# Altium PCB 2Motor_Driver_2021 - Copia.PcbDoc
Units mm, origin at the board's own origin, x right, y up, seen from the top; angles counter-clockwise.
Board outline 28.07 x 14 mm, 2 copper layers (Top Layer, Bottom Layer); 24 components, 22 nets, 98 pads, 5 vias.
Unrouted connection lines stored in the file: 32.
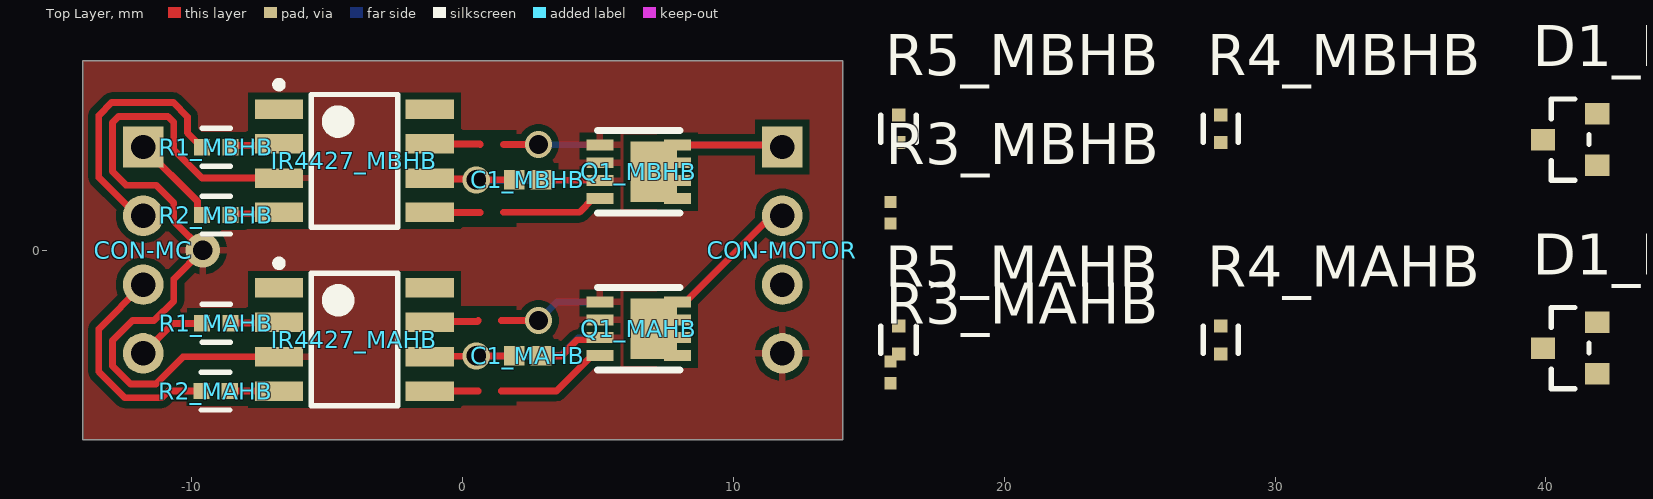
[diagram p0: Top Layer view]
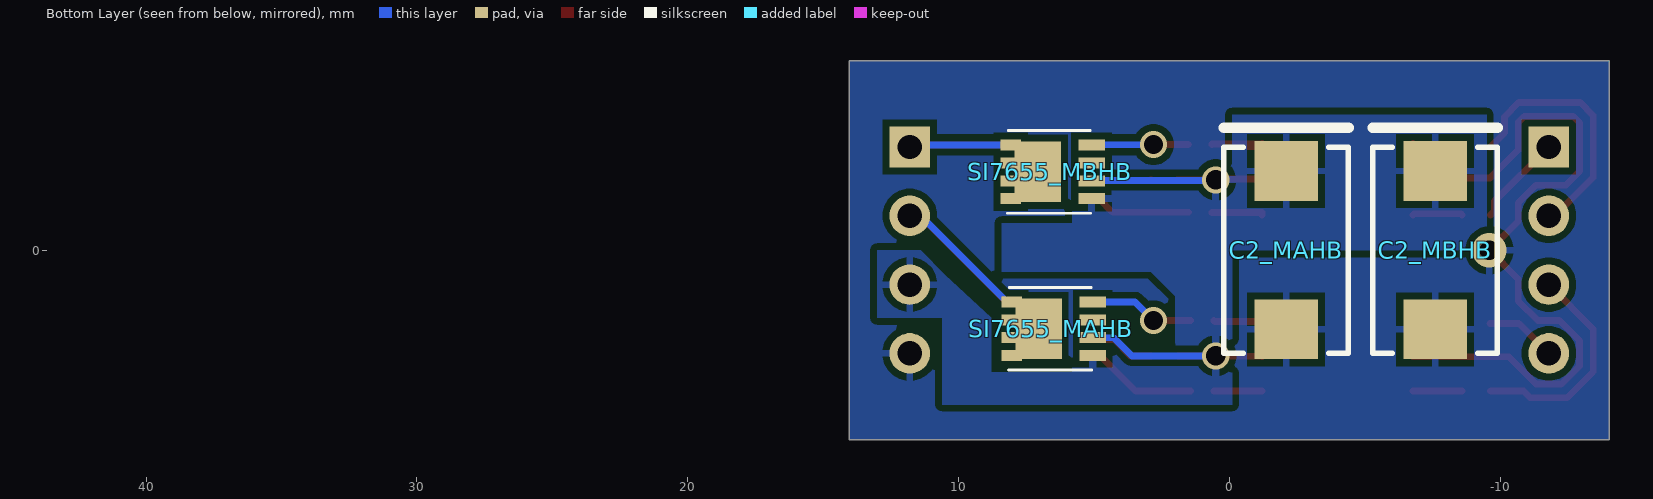
[diagram p1: Bottom Layer view, seen from below]

## Layer stack, top to bottom
Top Solder: solder mask 0.0102, Solder Resist, Dk 3.5
Top Layer: signal copper 0.0356
Dielectric 1: dielectric 0.32, FR-4, Dk 4.8
Bottom Layer: signal copper 0.0356
Bottom Solder: solder mask 0.0102, Solder Resist, Dk 3.5

## Board outline
-14.035,7 -14.035,-7 14.035,-7 14.035,7

## Design rules (kind name [scope] priority, off if disabled: settings)
Clearance [All] p1 off: gap=0.25 ignorepadtopadclearanceinfootprint=FALSE except(0: Arc-Hole Track-Hole SMDPad-Hole THPad-Hole Via-Hole Fill-Hole Poly-Hole Region-Hole Text-Hole)
ComponentClearance [All] p1: gap=0 collisioncheckmode=3 verticalgap=0 showdistances=FALSE
PolygonConnect "Schematic Polygon Connect Style_1" [InNet('MAOUT')] p1: connectstyle=Direct reliefconductorwidth=0.254 reliefentries=4 polygonreliefangle="45 Angle" airgapwidth=0.254
PolygonConnect "Schematic Polygon Connect Style" [InNet('MBOUT')] p2: connectstyle=Direct reliefconductorwidth=0.254 reliefentries=4 polygonreliefangle="45 Angle" airgapwidth=0.254
PolygonConnect [All] p3: connectstyle=Relief reliefconductorwidth=0.254 reliefentries=4 polygonreliefangle="90 Angle" airgapwidth=0.254
RoomDefinition Motor_Driver_2021 [InComponentClass('Motor_Driver_2021')] p1 off: confinementstyle=ConfineIn formatcopy=TRUE lockcomponents=FALSE outline 14.924,-6.223 39.435,-6.223 39.435,6.604 14.924,6.604
RoomDefinition MBHB [InComponentClass('MBHB')] p2 off: confinementstyle=ConfineIn formatcopy=TRUE lockcomponents=FALSE outline 14.9,21.2 127.803,21.2 127.803,33.265 14.9,33.265
RoomDefinition MAHB [InComponentClass('MAHB')] p3 off: confinementstyle=ConfineIn formatcopy=TRUE lockcomponents=FALSE outline 14.924,7.874 127.827,7.874 127.827,19.939 14.924,19.939
RoutingVias [All] p1: holewidth=0.711 width=1 viastyle="Through Hole" minholewidth=0.711 minwidth=1 maxholewidth=0.711 maxwidth=1
SolderMaskExpansion [All] p1: expansion=0.102 istentingtop=FALSE
Width [All] p1: maxlimit=0.254 minlimit=0.254 preferedwidth=0.254
29 further rules are at their usual default settings.

## Classes and differential pairs
channel class Half_Bridge: MAHB MBHB
component class Motor_Driver_2021: CON-MC CON-MOTOR
component class MBHB: C1_MBHB C2_MBHB D1_MBHB IR4427_MBHB Q1_MBHB R1_MBHB R2_MBHB R5_MBHB SI7655_MBHB
component class MAHB: C1_MAHB C2_MAHB D1_MAHB IR4427_MAHB Q1_MAHB R1_MAHB R2_MAHB R5_MAHB SI7655_MAHB

## Components (designator, comment, footprint, x,y, rotation, side; value= is the part's Value field where it differs from the comment)
C1_MAHB "CL05B104KO5NNNC" CAPC1050X55X23ML05T13 2.4,-3.9 r180 top (schematic designator C1)
C1_MBHB "CL05B104KO5NNNC" CAPC1050X55X23ML05T13 2.4,2.6 r180 top (schematic designator C1)
C2_MAHB "T491D475M050AT" KEMT-T491-D_L -2.1,0 r270 bottom (schematic designator C2)
C2_MBHB "T491D475M050AT" KEMT-T491-D_L -7.6,0 r270 bottom (schematic designator C2)
CON-MC "22032041" 04x01_Conector_Male -11.8,0 r90 top
CON-MOTOR "22032041" 04x01_Conector_Male 11.8,0 r90 top
D1_MAHB "MMBZ5240B-7-F" Diodes_SOT23_0 40.895,-3.615 r90 top (schematic designator D1)
D1_MBHB "MMBZ5240B-7-F" Diodes_SOT23_0 40.895,4.085 r90 top (schematic designator D1)
IR4427_MAHB "IR4427STRPBF" IR4427-PCB -4,-3.3 r0 top (schematic designator IR4427)
IR4427_MBHB "IR4427STRPBF" IR4427-PCB -4,3.3 r0 top (schematic designator IR4427)
Q1_MAHB "SIS412DN-T1-GE3" POWERPAK-1212-8 6.5,-2.9 r0 top (schematic designator Q1)
Q1_MBHB "SIS412DN-T1-GE3" POWERPAK-1212-8 6.5,2.9 r0 top (schematic designator Q1)
R1_MAHB "CRCW0402330RFKED" FP-CRCW0402-e3-MFG -9.1,-2.7 r0 top (schematic designator R1)
R1_MBHB "CRCW0402330RFKED" FP-CRCW0402-e3-MFG -9.1,3.8 r0 top (schematic designator R1)
R2_MAHB "CRCW0402330RFKED" FP-CRCW0402-e3-MFG -9.125,-5.2 r0 top (schematic designator R2)
R2_MBHB "CRCW0402330RFKED" FP-CRCW0402-e3-MFG -9.1,1.3 r0 top (schematic designator R2)
R3_MAHB "ERJ-2RKF4701X" RESC1005X40X25LL05T05 15.795,-4.515 r90 top (schematic designator R3)
R3_MBHB "ERJ-2RKF4701X" RESC1005X40X25LL05T05 15.795,1.385 r90 top (schematic designator R3)
R4_MAHB "ERJ-2GEJ104X" Panasonic_ERJ-2G_0 27.995,-3.315 r90 top (schematic designator R4)
R4_MBHB "ERJ-2GEJ104X" Panasonic_ERJ-2G_0 27.995,4.485 r90 top (schematic designator R4)
R5_MAHB "ERJ-2GEJ104X" Panasonic_ERJ-2G_0 16.095,-3.315 r90 top (schematic designator R5)
R5_MBHB "ERJ-2GEJ104X" Panasonic_ERJ-2G_0 16.095,4.485 r90 top (schematic designator R5)
SI7655_MAHB "SI7655DN-T1-GE3" SIS862DNT1GE3 6.6,-2.9 r0 bottom (schematic designator SI7655)
SI7655_MBHB "SI7655DN-T1-GE3" SIS862DNT1GE3 6.638,2.893 r0 bottom (schematic designator SI7655)

## Footprints (in the part's own frame and the unit in brackets; to place one, negate y for a bottom-side part, rotate by r counter-clockwise, add the part's x,y. Pads: shape width x height; smd on the part's side, far side on the other; paste and mask are expansions set on the pad)
04x01_Conector_Male [mm] "0022032041"
  rect 1.5x1.5 hole 0.9: 1(3.81,0)
  round 1.5 hole 0.9: 2(1.27,0) 3(-1.27,0) 4(-3.81,0)
  body extent -4.95,-1.18 4.95,1.18, height 3.38
CAPC1050X55X23ML05T13 [mm] "Chip Capacitor, 2-Leads, Body 1.05x0.55mm, IPC Low Density"
  rect 0.76x0.72 smd: 1(-0.49,0) 2(0.49,0)
  body extent -0.53,-0.28 0.53,0.27, height 0.55
Diodes_SOT23_0 [mm]
  rect 0.8x0.9 smd paste+0 mask+0: 1(0,1) 2(-0.95,-1) 3(0.95,-1)
  silkscreen extent -1.5,-0.7 1.5,0.7, body extent -1.6,-1.55 1.6,1.55, height 0.25
FP-CRCW0402-e3-MFG [mm]
  rect 0.6x0.6 smd paste+0 mask+0: 1(-0.525,0) 2(0.525,0)
  silkscreen extent -0.53,-0.7 0.53,0.7, body extent -0.92,-0.4 0.92,0.4, height 0.25
IR4427-PCB [mm] "SOIC, 8-Leads, Body 4,85x3,90mm, Pitch 1,27mm, IPC Medium Density"
  rect 1.78x0.72 smd: 1(-2.785,1.905) 2(-2.785,0.635) 3(-2.785,-0.635) 4(-2.785,-1.905) 5(2.785,-1.905) 6(2.785,-0.635) 7(2.785,0.635) 8(2.785,1.905)
  silkscreen extent -2.91,-2.45 1.6,2.94, body extent -2,-2.45 2,2.45, height 1.75
KEMT-T491-D_L [mm] "Molded Capacitor, 2-Leads, Body 7.60x4.60mm, IPC High Density"
  rect 2.2x2.35 smd: 1(-2.925,0) 2(2.925,0)
  silkscreen extent -4.52,-2.3 3.8,2.3, body extent -3.8,-2.3 3.8,2.3, height 3.1
Panasonic_ERJ-2G_0 [mm]
  rect 0.475x0.5 smd paste+0 mask+0: 1(-0.512,0) 2(0.512,0)
  silkscreen extent -0.5,-0.65 0.5,0.65, body extent -0.85,-0.38 0.85,0.38, height 0.25
POWERPAK-1212-8 [mm]
  rect 0.99x0.405 smd: 1(-1.435,0.99) 2(-1.435,0.33) 3(-1.435,-0.33) 4(-1.435,-0.99) 5(1.435,-0.99) 6(1.435,-0.33) 7(1.435,0.33) 8(1.435,0.99)
  rect 1.725x2.235 smd: 9(0.557,0)
  silkscreen extent -1.53,-1.53 1.53,1.53
RESC1005X40X25LL05T05 [mm] "Chip Resistor, 2-Leads, Body 1.05x0.55mm, IPC High Density"
  rect 0.45x0.45 smd: 1(-0.4,0) 2(0.4,0)
  body extent -0.53,-0.28 0.53,0.28, height 0.4
SIS862DNT1GE3 [mm]
  rect 0.99x0.405 smd: 1(-1.555,0.992) 2(-1.555,0.332) 3(-1.555,-0.328) 4(-1.555,-0.988)
  rect 0.51x0.405 smd: 5(1.555,-0.988) 6(1.555,-0.328) 7(1.555,0.332) 8(1.555,0.992)
  rect 1.725x2.235 smd: 9(0.438,0.002)
  rect 0.25x0.077 smd: 10(1.175,-1.156) 11(1.175,1.156)
  silkscreen extent -1.53,-1.53 1.56,1.53, body extent -1.65,-0.02 1.65,1.04, height 1.65

## Part data
C1_MAHB C1_MBHB: library part CMP-2000-05439-1, "Chip Capacitor, 100 nF, +/- 10%, 16 V, -55 to 125 degC, 0402 (1005 Metric), RoHS, Tape and Reel", Capacitance=100000pF, Case Size/Dimension=0402, Dielectric=X7R, Manufacturer="Samsung Electro-Mechanics", Rated Voltage=16V, Tolerance (%)=±10%, Datasheet URL=https://datasheet.ciiva.com/29198/458718-da-01-en-vs-kondensator-0402-29198423.pdf, Datasheet Version=Nov-10, Manufacturer URL=http://www.samsungsem.com/global/index.jsp
C2_MAHB C2_MBHB: library part CMP-2000-07203-1, "Tantalum Surface Mount Capacitor, 4.7 uF, +/- 20%, 50 V, -55 to 125 degC, 2-Pin SMD, RoHS, Tape and Reel", Capacitance=4700000pF, Case Code=D, Case Style=Molded, Manufacturer=Kemet, Operating Temp Range=-55Cto125C, Package / Case=7343-31, Package Description="2-Pin Surface Mount Device, Body 7.3 x 4.3 mm", Package Reference=T491-D, Tolerance (+ or -)=20%, Voltage=50VDC, Construction=SMTChip, Datasheet URL=http://www.kemet.com/Lists/ProductCatalog/Attachments/254/KEM_T2005_T491.pdf, Datasheet Version=06/2016, DCL=2.4uA, DF=6%, ESR=1.4ohm, Failure Rate=NotRequired, Insulation=NotRequired, Lead Spacing (nom)=NotRequiredmm, Length W/Weld=NotRequiredmm, Length W/Weld (max)=NotRequiredmm, Manufacturer URL=http://www.kemet.com/, Mounting Style=SurfaceMount, Mounting Technology=SurfaceMount, Packaging=TapeandReel, Polarity=Polar, Product Depth (mm)=4.3mm, Product Diameter (mm)=NotRequiredmm, Product Height (mm)=2.8mm, Product Length (mm)=7.3mm, Rad Hardened=No, Seal=NotRequired, Seated Plane Height=NotRequiredmm, Wire Form=NotRequired
CON-MC CON-MOTOR: library part 04x01_Conector_Male-SCH, "CONN HEADER 4POS .100 VERT TIN"
IR4427_MAHB IR4427_MBHB: library part IR4427, "IC DRIVER DUAL LOW SIDE 8-DIP"
Q1_MAHB Q1_MBHB: "MOSFET (N-Channel)", Manufacturer_Name=Vishay, Mouser2 Part Number=781-SIS412DN-T1-GE3, Datasheet Link=https://componentsearchengine.com//SIS412DN-T1-GE3.pdf, Manufacturer_Part_Number=SIS412DN-T1-GE3, Mouser2 Price/Stock=https://www.mouser.com/Search/Refine.aspx?Keyword=781-SIS412DN-T1-GE3
R1_MAHB R1_MBHB R2_MAHB R2_MBHB: library part CMP-2002-08523-2, "RES Thick Film, 330Ω, 1%, 0.063W, 100ppm/°C, 0402", Case Code (Imperial)=0402, Case Code (Metric)=1005, Max Operating Temperature=155°C, Max Power Dissipation=63mW, Min Operating Temperature=-55°C, Package Quantity=10, Resistance=330R, Temperature Coefficient=100ppm/°C, Tolerance=1%, Voltage Rating=50V, Case/Package=0402, Composition="Thick Film", Contact Plating=Tin, Depth=0.5mm, Features="Automotive AEC-Q200", Height=0.35mm, Lead Free="Lead Free", Length=1mm, Military Standard=Not, Number of Terminations=2, Packaging="Tape and Reel", Power Rating=63mW, Radiation Hardening=No, Termination=SMD/SMT, Voltage Rating (DC)=50V, Weight=2.3E-05oz, Width=0.5mm
R3_MAHB R3_MBHB: library part CMP-2002-01154-4, "Chip Resistor, 4.7 KOhm, +/- 1%, 0.1 W, -55 to 155 degC, 0402 (1005 Metric), RoHS, Tape and Reel", Case Code (Imperial)=0402, Case Code (Metric)=1005, Max Operating Temperature="155 degC", Min Operating Temperature="-55 degC", Package Quantity=1, Power Rating="100 mW", Resistance="4.7 KOhm", Tolerance=1%, Voltage Rating="50 V", Case\/Package=0402, ComponentLink1Description="Manufacturer URL", ComponentLink1URL=http://www.panasonic.com/, ComponentLink2Description=Datasheet, ComponentLink2URL=http://industrial.panasonic.com/cdbs/www-data/pdf/RDA0000/AOA0000C86.pdf, DatasheetVersion=04/2015, Height="0.35 mm", Length="1 mm", Mount="Surface Mount", Mounting Technology="Surface Mount", PackageDescription="2-Pin Surface Mount Device, Body 1 x 0.5 mm", PackageReference=0402, Packaging="Cut Tape", PartNumber=ERJ-2RKF4701X, Pins=2, Radiation Hardening=No, REACH SVHC=Yes, RoHSCompliant=true, Width="0.5 mm"
SI7655_MAHB SI7655_MBHB: "MOSFET (P-Channel)", Manufacturer_Name=Vishay, Mouser Part Number=78-SI7655DN-T1-GE3, Arrow Part Number=SI7655DN-T1-GE3, Arrow Price/Stock=https://www.arrow.com/en/products/si7655dn-t1-ge3/vishay, Datasheet Link=https://www.vishay.com/docs/63617/si7655dn.pdf, Manufacturer_Part_Number=SI7655DN-T1-GE3, Mouser Price/Stock=https://www.mouser.co.uk/ProductDetail/Vishay-Semiconductors/SI7655DN-T1-GE3?qs=8YL4b%2FT9KqrUzqvG%2FOmMqw%3D%3D

## Via types
v1: diameter 1, hole 0.711, Top Layer to Bottom Layer, 4 vias
v2: diameter 1.27, hole 0.711, Top Layer to Bottom Layer, 1 vias

## Nets (pads, with @x,y where several pads share a name; then routed paths per layer and width w, separated by ;. In a path a pad name is that pad's centre, name@x,y a point inside that pad or via, vN(x,y) a via of type N, cw(c..) or ccw(c..) an arc to the next point about the centre after c; other vN are vias at no path point)
GND: C1_MAHB.1 C1_MBHB.1 C2_MAHB.2 C2_MBHB.2 CON-MOTOR.4 IR4427_MAHB.3 IR4427_MBHB.3 Q1_MAHB.1 Q1_MAHB.2 Q1_MAHB.3 Q1_MBHB.1 Q1_MBHB.2 Q1_MBHB.3 | length 32.1
  Top Layer w0.254: IR4427_MAHB.3 -10.326,-3.935 -11.332,-4.941 -12.268,-4.941 -12.931,-4.278 -12.931,-3.331 -12.2,-2.6 -11.4,-2.6 -10.669,-1.869 -10.669,-1.069 v2(-9.6,0) -10.669,1.069 -10.669,1.738 -11.332,2.401 -12.43,2.401 -12.931,2.902 -12.931,4.718 -12.708,4.941 -10.892,4.941 -10.669,4.718 -10.669,3.705 -9.629,2.665 IR4427_MBHB.3 ; C1_MAHB.1 3.651,-3.9 4.246,-3.306 4.989,-3.306 Q1_MAHB.3 ; C1_MBHB.1 2.905,2.585 5.05,2.585 Q1_MBHB.3@5.065,2.6
MAHIN: CON-MC.4 R1_MAHB.1 | length 2.6
  Top Layer w0.254: CON-MC.4 -10.69,-2.7 R1_MAHB.1
MALIN: CON-MC.3 R2_MAHB.1 | length 8.2
  Top Layer w0.254: CON-MC.3 -13.439,-2.909 -13.439,-4.489 -12.479,-5.449 -11.121,-5.449 -10.872,-5.2 R2_MAHB.1
MAOUT: CON-MOTOR.2 Q1_MAHB.5 Q1_MAHB.6 Q1_MAHB.7 Q1_MAHB.8 SI7655_MAHB.5 SI7655_MAHB.6 SI7655_MAHB.7 SI7655_MAHB.8 | length 10.1
  Top Layer w0.254: Q1_MAHB.8 8.227,-1.91 11.169,1.032 11.562,1.032 CON-MOTOR.2
  Bottom Layer w0.254: SI7655_MAHB.5 8.207,-1.912 11.151,1.032 11.562,1.032 CON-MOTOR.2
MBHIN: CON-MC.2 R1_MBHB.1 | length 9.6
  Top Layer w0.254: CON-MC.2 -12.017,1.27 -13.439,2.692 -13.439,4.979 -12.969,5.449 -10.682,5.449 -10.161,4.928 -10.161,4.336 R1_MBHB.1
MBLIN: CON-MC.1 R2_MBHB.1 | length 3.4
  Top Layer w0.254: CON-MC.1 -9.798,1.808 -9.798,1.448 R2_MBHB.1@-9.65,1.3
MBOUT: CON-MOTOR.1 Q1_MBHB.5 Q1_MBHB.6 Q1_MBHB.7 Q1_MBHB.8 SI7655_MBHB.5 SI7655_MBHB.6 SI7655_MBHB.7 SI7655_MBHB.8 | length 7.5
  Top Layer w0.254: Q1_MBHB.8@7.978,3.89 11.72,3.89 CON-MOTOR.1
  Bottom Layer w0.254: SI7655_MBHB.5@8.217,3.89 11.72,3.89 CON-MOTOR.1
NetD1_MAHB_1: D1_MAHB.1 R3_MAHB.2 SI7655_MAHB.1 SI7655_MAHB.2 SI7655_MAHB.3
NetD1_MAHB_2: D1_MAHB.2 R4_MAHB.2 SI7655_MAHB.4 | length 3.9
  Top Layer w0.254: 1.425,-2.6 v1(2.8,-2.6)
  Bottom Layer w0.254: v1(2.8,-2.6) 3.488,-1.912 SI7655_MAHB.4
NetD1_MBHB_1: D1_MBHB.1 R3_MBHB.2 SI7655_MBHB.1 SI7655_MBHB.2 SI7655_MBHB.3
NetD1_MBHB_2: D1_MBHB.2 R4_MBHB.2 SI7655_MBHB.4 | length 3.6
  Top Layer w0.254: 1.5,3.9 v1(2.8,3.9)
  Bottom Layer w0.254: v1(2.8,3.9) 2.805,3.895 5.102,3.895 SI7655_MBHB.4@5.107,3.89
NetIR4427_MAHB_2: IR4427_MAHB.2 R1_MAHB.2 | length 1.8
  Top Layer w0.254: R1_MAHB.2 -8.557,-2.682 -6.802,-2.682 IR4427_MAHB.2
NetIR4427_MAHB_4: IR4427_MAHB.4 R2_MAHB.2 | length 1.8
  Top Layer w0.254: R2_MAHB.2 -8.598,-5.202 -6.788,-5.202 IR4427_MAHB.4
NetIR4427_MAHB_5: IR4427_MAHB.5 R5_MAHB.1 | length 1.8
  Top Layer w0.254: IR4427_MAHB.5 -1.212,-5.202 0.573,-5.202 0.575,-5.2
NetIR4427_MAHB_7: IR4427_MAHB.7 R4_MAHB.1 | length 1.8
  Top Layer w0.254: IR4427_MAHB.7 -1.182,-2.632 0.543,-2.632 0.575,-2.6
NetIR4427_MBHB_2: IR4427_MBHB.2 R1_MBHB.2 | length 1.9
  Top Layer w0.254: R1_MBHB.2 -8.507,3.868 -6.853,3.868 IR4427_MBHB.2 ; IR4427_MBHB.2@-6.803,3.818 IR4427_MBHB.2@-6.785,3.835
NetIR4427_MBHB_4: IR4427_MBHB.4 R2_MBHB.2 | length 1.9
  Top Layer w0.254: R2_MBHB.2@-8.598,1.298 -8.6,1.3 -8.553,1.348 -6.837,1.348 IR4427_MBHB.4@-6.785,1.295
NetIR4427_MBHB_5: IR4427_MBHB.5 R5_MBHB.1 | length 1.9
  Top Layer w0.254: IR4427_MBHB.5@-1.215,1.295 IR4427_MBHB.5@-1.213,1.298 ; IR4427_MBHB.5 -1.213,1.398 0.647,1.398 0.65,1.4
NetIR4427_MBHB_7: IR4427_MBHB.7 R4_MBHB.1 | length 2.4
  Top Layer w0.254: IR4427_MBHB.7@-1.215,3.835 IR4427_MBHB.7@-0.685,3.835 ; IR4427_MBHB.7 -1.198,3.918 0.632,3.918 0.65,3.9
NetQ1_MAHB_4: Q1_MAHB.4 R5_MAHB.2 | length 4.2
  Top Layer w0.254: 1.425,-5.2 3.463,-5.2 4.772,-3.89 Q1_MAHB.4
NetQ1_MBHB_4: Q1_MBHB.4 R5_MBHB.2 | length 3.8
  Top Layer w0.254: 1.5,1.4 4.305,1.4 4.815,1.91 Q1_MBHB.4@5.108,1.91
VCC: C1_MAHB.2 C1_MBHB.2 C2_MAHB.1 C2_MBHB.1 CON-MOTOR.3 IR4427_MAHB.6 IR4427_MBHB.6 R3_MAHB.1 R3_MBHB.1 | length 15.8
  Top Layer w0.254: IR4427_MBHB.6@-1.239,2.656 IR4427_MBHB.6@-1.211,2.628 ; IR4427_MAHB.6 -1.198,-3.918 0.482,-3.918 v1(0.5,-3.9) C1_MAHB.2 ; IR4427_MBHB.6 -1.182,2.632 0.467,2.632 v1(0.5,2.6) C1_MBHB.2
  Bottom Layer w0.254: v1(0.5,-3.9) 3.6,-3.9 4.268,-3.232 5.045,-3.232 ; v1(0.5,2.6) 0.52,2.58 5.064,2.58 5.083,2.561
pads on no net: D1_MAHB.3 D1_MBHB.3 IR4427_MAHB.1 IR4427_MAHB.8 IR4427_MBHB.1 IR4427_MBHB.8 Q1_MAHB.9 Q1_MBHB.9 SI7655_MAHB.9 SI7655_MAHB.10 SI7655_MAHB.11 SI7655_MBHB.9 SI7655_MBHB.10 SI7655_MBHB.11

## Polygon pours and split planes (outlines as drawn)
GND on Bottom Layer "GND_L02_P006" (solid, pour order 6): -14.027,7 -14.033,6.994 -14.033,-6.994 13.994,-6.994 14,-7 14,7
VCC on Bottom Layer "VCC_L02_P003" (solid, pour order 3): 13,0 13,-2.5 10.6,-2.5 10.6,-5.7 5.1,-5.7 5.1,-4.5 8.8,-4.5 8.8,-2.5 10.5,-0.9 11.4,0
VCC on Bottom Layer "VCC_L02_P001" (solid, pour order 1): -9.5,5 -9.5,0 0,0 -0.1,-0.1 -0.1,-5.7 5.8,-5.7 5.8,-2.2 3.9,-2.2 3.8,-2.3 3.8,-3.4 2,-3.4 2,-1.7 2.9,-0.8 8.4,-0.8 8.4,1 5.8,1 5.8,3.5 3.5,3.5 3.2,3.2 -0.1,3.2 -0.1,5 -0.7,5
GND on Top Layer "GND_L01_P009" (solid, pour order 9): -14,7 -14,-7 14,-7 14,7